# Altium PCB main_adapter_board_2016.PcbDoc
Units mm, origin at the board's own origin, x right, y up, seen from the top; angles counter-clockwise.
Board outline 100 x 40 mm, 2 copper layers (Top Layer, Bottom Layer), stack 1.571 mm thick; 76 components, 41 nets, 177 pads, 29 vias.
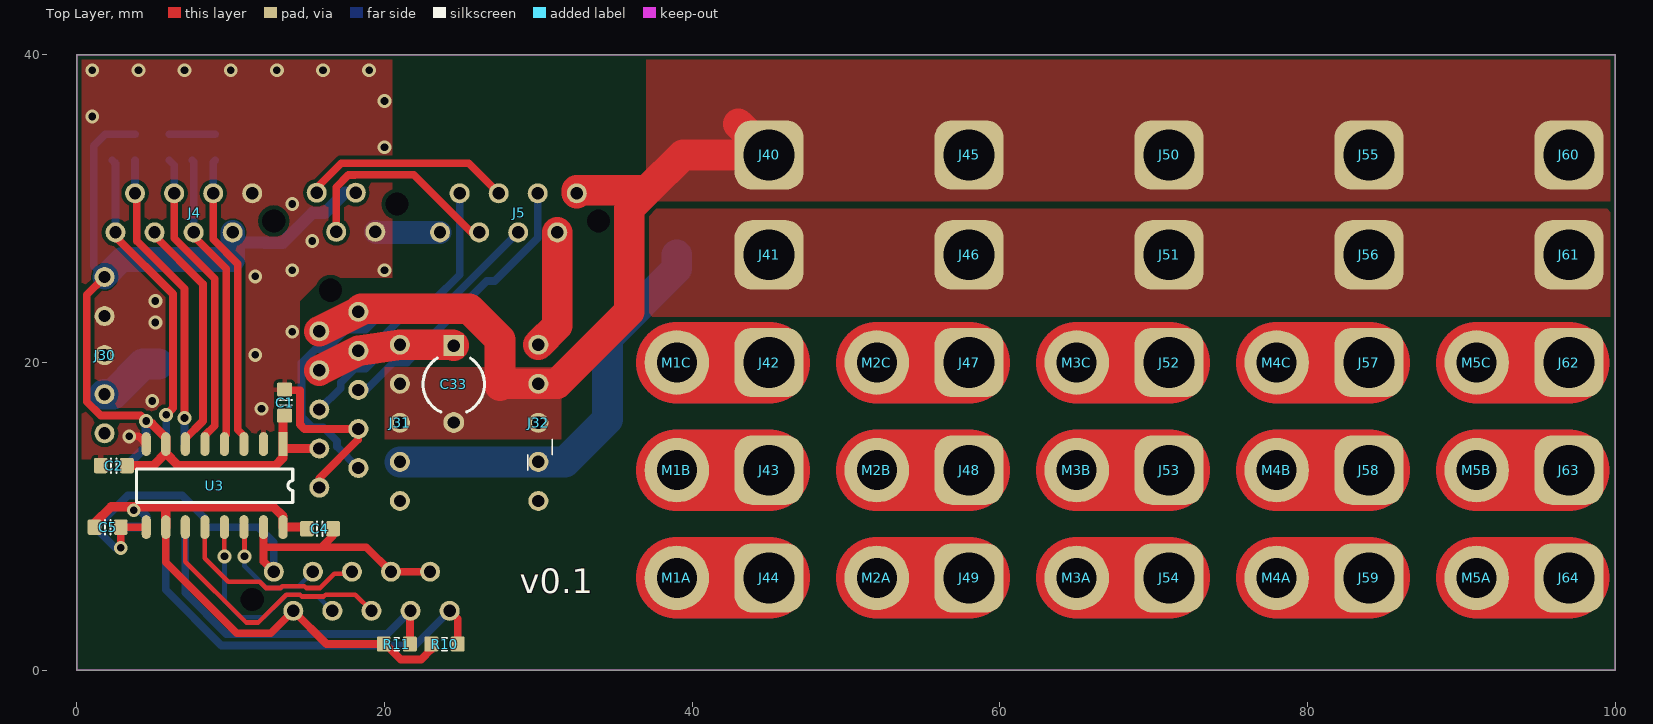
[diagram p0: Top Layer view]
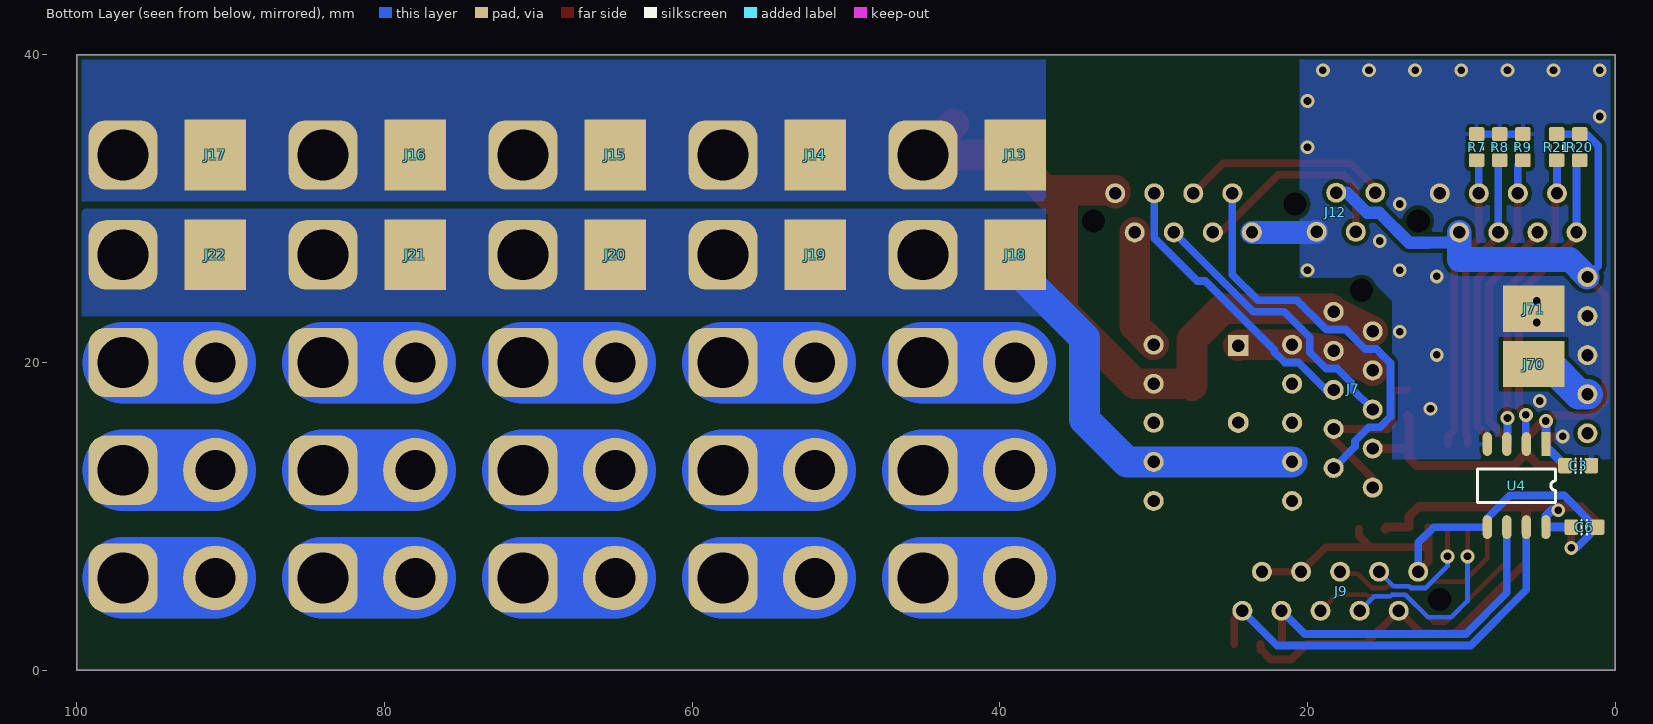
[diagram p1: Bottom Layer view, seen from below]
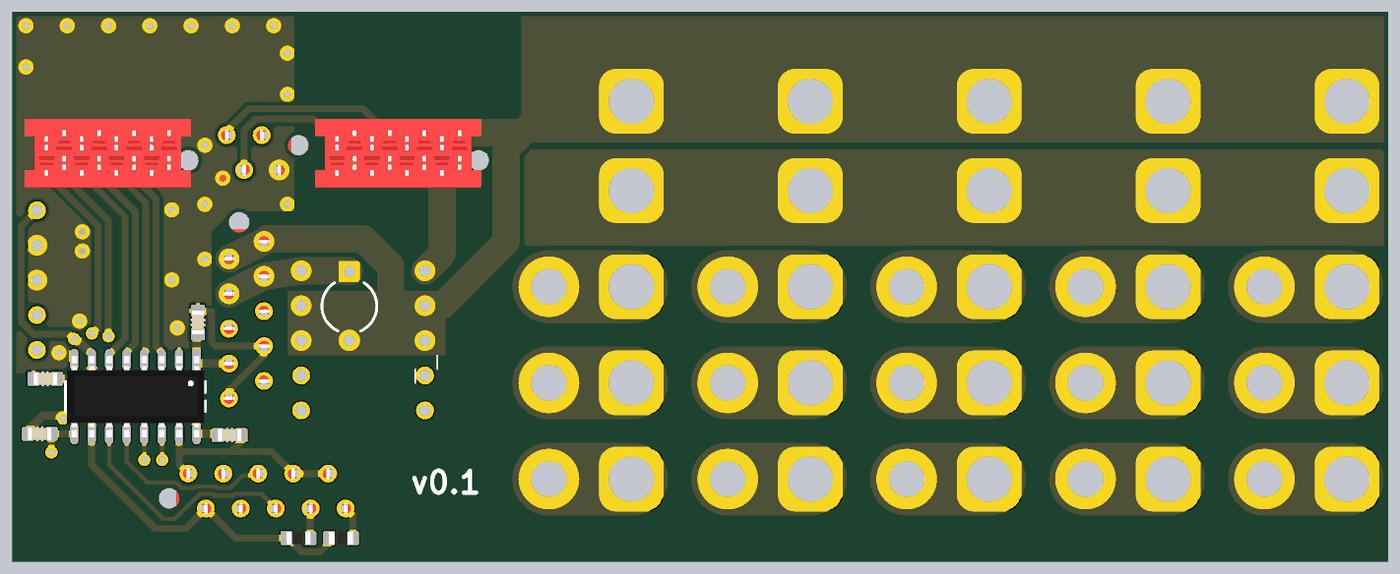
[diagram p2: 3D render of the assembled board from above, using the file's embedded part models]
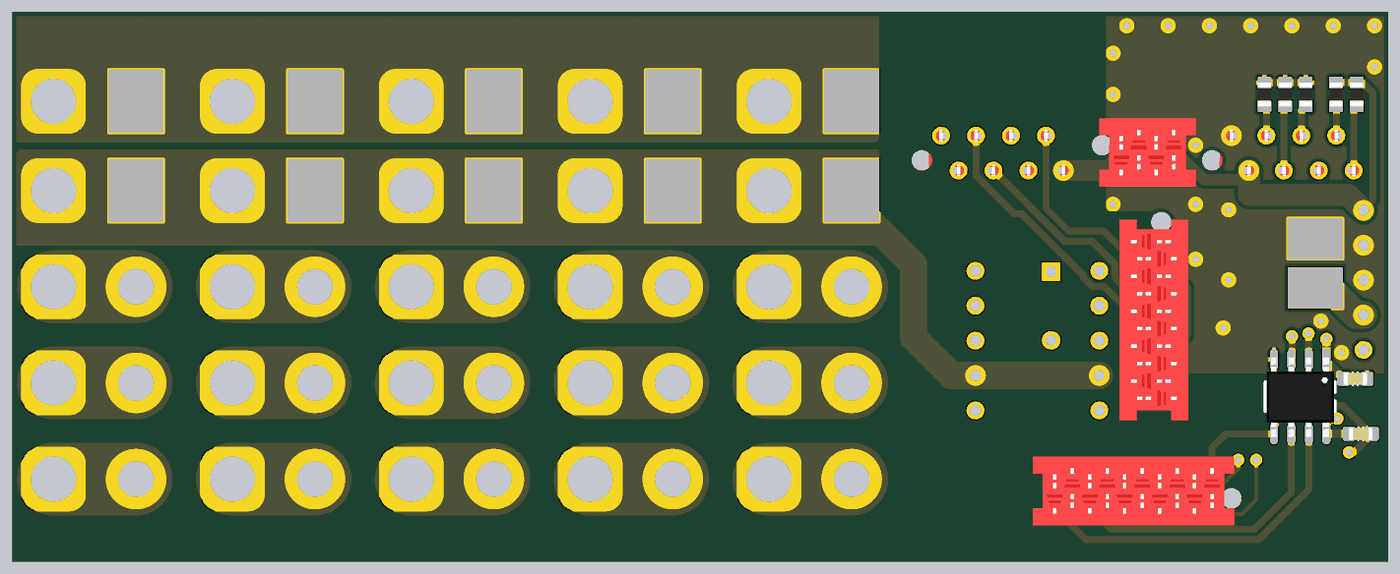
[diagram p3: 3D render of the assembled board from below, using the file's embedded part models]

## Layer stack, top to bottom
Top Solder: solder mask 0.0102, Solder Resist, Dk 3.5
Top Layer: signal copper 0.0356
Dielectric 1: dielectric 1.5, FR-4, Dk 4.8
Bottom Layer: signal copper 0.0356
Bottom Solder: solder mask 0.0102, Solder Resist, Dk 3.5

## Board outline
0,0 100,0 100,40 0,40

## Design rules (kind name [scope] priority, off if disabled: settings)
Clearance [All] p1: gap=0.254
ComponentClearance [All] p1: gap=0.1 collisioncheckmode=3 verticalgap=0.1 showdistances=FALSE
ComponentClearance ComponentClearanceIgnore [InComponent('C40')] p2: gap=0 collisioncheckmode=3 verticalgap=0 showdistances=FALSE
HoleSize [All] p1: absolutevalues=TRUE maxlimit=6 minlimit=0.3 maxpercent=80.000 minpercent=20.000
PolygonConnect PolygonConnectDirect [IsVia or InNet('16V') or InNet('PGND') or InComponent('J71') or InComponent('J30') or InComponent('J4') or InComponent('J12')] p1: connectstyle=Direct reliefconductorwidth=0.254 reliefentries=4 polygonreliefangle="90 Angle" airgapwidth=0.254
PolygonConnect [All] p2: connectstyle=Relief reliefconductorwidth=0.3 reliefentries=4 polygonreliefangle="90 Angle" airgapwidth=0.2
RoomDefinition main_adapter_board_2016 [InComponentClass('main_adapter_board_2016')] p1: confinementstyle=ConfineIn formatcopy=TRUE lockcomponents=FALSE outline 0,0 100,0 100,50 0,50
RoutingVias [All] p1: holewidth=0.7 width=0.4 viastyle="Through Hole" minholewidth=0.3 minwidth=0.6 maxholewidth=2 maxwidth=3
SolderMaskExpansion [All] p1: expansion=0.102
Width [All] p1: maxlimit=10 minlimit=0.2 preferedwidth=0.3 minimp=50.000000 maximp=50.000000 favimp=50.000000
28 further rules are at their usual default settings.

## Components (designator, comment, footprint, x,y, rotation, side; value= is the part's Value field where it differs from the comment)
C1 "100n" CAPC1608X90N 13.5,17.4 r90 top
C2 "100n" CAPC1608X90N 2.4,13.3 r0 top
C3 "100n" CAPC1608X90N 2.4,13.3 r0 bottom
C4 "100n" CAPC1608X90N 15.8,9.2 r180 top
C5 "100n" CAPC1608X90N 2,9.3 r0 top
C6 "100n" CAPC1608X90N 2,9.3 r180 bottom
C33 "470uF" CAPR5-4X5 24.5,18.6 r270 top
J4 "HEADER-8" MICRO-MATCH-8 11.4,31 r0 top
J5 "HEADER-8" MICRO-MATCH-8 32.5,31 r0 top
J7 "DRIBBLER" MICRO-MATCH-10 18.3,23.3 r90 bottom
J9 "COIL" MICRO-MATCH-10 12.8,6.4 r180 bottom
J12 "ERF" MICRO-MATCH-4 19.4,28.5 r0 bottom
J13 "GND_PAD" POWER-PAD 39,33.5 r180 bottom
J14 "GND_PAD" POWER-PAD 52,33.5 r180 bottom
J15 "GND_PAD" POWER-PAD 65,33.5 r180 bottom
J16 "GND_PAD" POWER-PAD 78,33.5 r180 bottom
J17 "GND_PAD" POWER-PAD 91,33.5 r180 bottom
J18 "16V_PAD" POWER-PAD 39,27 r180 bottom
J19 "16V_PAD" POWER-PAD 52,27 r180 bottom
J20 "16V_PAD" POWER-PAD 65,27 r180 bottom
J21 "16V_PAD" POWER-PAD 78,27 r180 bottom
J22 "16V_PAD" POWER-PAD 91,27 r180 bottom
J30 "D24V25F5" PIN-HEADER-5 1.8,15.4 r90 top
J31 "D24V25F7" PIN-HEADER-5 21,11 r90 top
J32 "D24V25F3" PIN-HEADER-5 30,11 r90 top
J40 "HEADER-1" 2MM-BULLET-PLUG-VIA#1 45,33.5 r0 top
J41 "HEADER-1" 2MM-BULLET-PLUG-VIA#1 45,27 r0 top
J42 "HEADER-1" 2MM-BULLET-PLUG-VIA#1 45,20 r0 top
J43 "HEADER-1" 2MM-BULLET-PLUG-VIA#1 45,13 r0 top
J44 "HEADER-1" 2MM-BULLET-PLUG-VIA#1 45,6 r0 top
J45 "HEADER-1" 2MM-BULLET-PLUG-VIA#2 61,33.5 r0 top
J46 "HEADER-1" 2MM-BULLET-PLUG-VIA#1 58,27 r0 top
J47 "HEADER-1" 2MM-BULLET-PLUG-VIA#1 58,20 r0 top
J48 "HEADER-1" 2MM-BULLET-PLUG-VIA#1 58,13 r0 top
J49 "HEADER-1" 2MM-BULLET-PLUG-VIA#1 58,6 r0 top
J50 "HEADER-1" 2MM-BULLET-PLUG-VIA#3 73,33.5 r0 top
J51 "HEADER-1" 2MM-BULLET-PLUG-VIA#1 71,27 r0 top
J52 "HEADER-1" 2MM-BULLET-PLUG-VIA#1 71,20 r0 top
J53 "HEADER-1" 2MM-BULLET-PLUG-VIA#1 71,13 r0 top
J54 "HEADER-1" 2MM-BULLET-PLUG-VIA#1 71,6 r0 top
J55 "HEADER-1" 2MM-BULLET-PLUG-VIA#4 85,33.5 r0 top
J56 "HEADER-1" 2MM-BULLET-PLUG-VIA#1 84,27 r0 top
J57 "HEADER-1" 2MM-BULLET-PLUG-VIA#1 84,20 r0 top
J58 "HEADER-1" 2MM-BULLET-PLUG-VIA#1 84,13 r0 top
J59 "HEADER-1" 2MM-BULLET-PLUG-VIA#1 84,6 r0 top
J60 "HEADER-1" 2MM-BULLET-PLUG-VIA#1 97,33.5 r0 top
J61 "HEADER-1" 2MM-BULLET-PLUG-VIA#1 97,27 r0 top
J62 "HEADER-1" 2MM-BULLET-PLUG-VIA#1 97,20 r0 top
J63 "HEADER-1" 2MM-BULLET-PLUG-VIA#1 97,13 r0 top
J64 "HEADER-1" 2MM-BULLET-PLUG-VIA#1 97,6 r0 top
J70 "16V_PAD" POWER-PAD-4x3 5.3,19.9 r180 bottom
J71 "GND_PAD" POWER-PAD-4x3 5.3,23.5 r180 bottom
M1A "HEADER-1" 2MM-BULLET-VIA 39,6 r0 top
M1B "HEADER-1" 2MM-BULLET-VIA 39,13 r0 top
M1C "HEADER-1" 2MM-BULLET-VIA 39,20 r0 top
M2A "HEADER-1" 2MM-BULLET-VIA 52,6 r0 top
M2B "HEADER-1" 2MM-BULLET-VIA 52,13 r0 top
M2C "HEADER-1" 2MM-BULLET-VIA 52,20 r0 top
M3A "HEADER-1" 2MM-BULLET-VIA 65,6 r0 top
M3B "HEADER-1" 2MM-BULLET-VIA 65,13 r0 top
M3C "HEADER-1" 2MM-BULLET-VIA 65,20 r0 top
M4A "HEADER-1" 2MM-BULLET-VIA 78,6 r0 top
M4B "HEADER-1" 2MM-BULLET-VIA 78,13 r0 top
M4C "HEADER-1" 2MM-BULLET-VIA 78,20 r0 top
M5A "HEADER-1" 2MM-BULLET-VIA 91,6 r0 top
M5B "HEADER-1" 2MM-BULLET-VIA 91,13 r0 top
M5C "HEADER-1" 2MM-BULLET-VIA 91,20 r0 top
R7 "10k" RESC1608X55N 9,34 r270 bottom
R8 "10k" RESC1608X55N 7.5,34 r270 bottom
R9 "10k" RESC1608X55N 6,34 r270 bottom
R10 "2.2k" RESC1608X55N 23.9,1.7 r180 top
R11 "2.2k" RESC1608X55N 20.8,1.7 r180 top
R20 "2.2k" RESC1608X55N 2.3,34 r270 bottom
R21 "2.2k" RESC1608X55N 3.8,34 r270 bottom
U3 "SI8641" SOIC16 13.4,14.7 r270 top
U4 "SI8602" SOIC8 4.5,14.7 r270 bottom

## Footprints (in the part's own frame and the unit in brackets; to place one, negate y for a bottom-side part, rotate by r counter-clockwise, add the part's x,y. Pads: shape width x height; smd on the part's side, far side on the other; paste and mask are expansions set on the pad)
2MM-BULLET-PLUG-VIA#1 [mm]
  rrect50% 4.5x4.5 hole 3.3: 1(0,0)
2MM-BULLET-PLUG-VIA#2 [mm]
  rrect50% 4.5x4.5 hole 3.3: 1(-3,0)
2MM-BULLET-PLUG-VIA#3 [mm]
  rrect50% 4.5x4.5 hole 3.3: 1(-2,0)
2MM-BULLET-PLUG-VIA#4 [mm]
  rrect50% 4.5x4.5 hole 3.3: 1(-1,0)
2MM-BULLET-VIA [mm]
  round 4.2 hole 2.6: 1(0,0)
CAPC1608X90N [mm] "Chip Capacitor, Body 1.6x0.8mm, EIA 0603, IPC Medium Density"
  round 0.254 on Mech15: 0(0,0)
  rrect25% 0.9x1 smd: 1(-0.85,0) 2(0.85,0)
  Top Layer pour cut-out: -0.6,0.5 -0.4,0.7 0.4,0.7 0.6,0.5 0.6,-0.5 0.4,-0.7 -0.4,-0.7 -0.6,-0.5
  silkscreen extent -0.18,-0.48 0.18,0.48, body extent -0.85,-0.45 0.85,0.45, height 0.89
CAPR5-4X5 [mm] "Capacitor; 2 Leads"
  rect 1.35x1.35 hole 0.8: 1(-2.5,0)
  round 1.35 hole 0.8: 2(2.5,0)
  silkscreen extent -1.69,-2 1.82,2
MICRO-MATCH-4 [mm]
  round 1.3 hole 0.8: 1(0,0) 2(-1.27,-2.54) 3(-2.54,0) 4(-3.81,-2.54)
  round 0 hole 1.5 unplated: drill(1.4,-1.8)
  body extent -5.41,-3.77 1.6,1.23, height 4
MICRO-MATCH-8 [mm]
  round 1.3 hole 0.8: 1(0,0) 2(-1.27,-2.54) 3(-2.54,0) 4(-3.81,-2.54) 5(-5.08,0) 6(-6.35,-2.54) 7(-7.62,0) 8(-8.89,-2.54)
  round 0 hole 1.5 unplated: drill(1.4,-1.8)
  body extent -10.49,-3.77 1.6,1.23, height 4
MICRO-MATCH-10 [mm]
  round 1.3 hole 0.8: 1(0,0) 2(-1.27,-2.54) 3(-2.54,0) 4(-3.81,-2.54) 5(-5.08,0) 6(-6.35,-2.54) 7(-7.62,0) 8(-8.89,-2.54) 9(-10.16,0) 10(-11.43,-2.54)
  round 0 hole 1.5 unplated: drill(1.4,-1.8)
  body extent -13.03,-3.77 1.6,1.23, height 4
PIN-HEADER-5 [mm]
  round 1.3 hole 0.8: 1(0,0) 2(2.54,0) 3(5.08,0) 4(7.62,0) 5(10.16,0)
POWER-PAD [mm]
  rect 4x4.6 smd: 1(0,0)
POWER-PAD-4x3 [mm]
  rect 4x3 smd: 1(0,0)
RESC1608X55N [mm] "Chip Resistor, Body 1.6x0.8mm, EIA 0603, IPC Medium Density"
  round 0.254 on Mech15: 0(0,0)
  rrect25% 0.9x1 smd: 1(-0.85,0) 2(0.85,0)
  Top Layer pour cut-out: -0.6,0.5 -0.4,0.7 0.4,0.7 0.6,0.5 0.6,-0.5 0.4,-0.7 -0.4,-0.7 -0.6,-0.5
  silkscreen extent -0.15,-0.41 0.15,0.41, body extent -0.87,-0.47 0.88,0.48, height 0.54
SOIC8 [mm]
  rect 1.55x0.6 smd: 1(0,0)
  oval 1.55x0.6 smd: 2(0,-1.27) 3(0,-2.54) 4(0,-3.81) 5(5.4,-3.81) 6(5.4,-2.54) 7(5.4,-1.27) 8(5.4,0)
  silkscreen extent 1.61,-4.45 3.79,0.63, body extent -0.16,-4.35 5.61,0.55, height 1.46
SOIC16 [mm]
  rect 1.55x0.6 smd: 1(0,0)
  oval 1.55x0.6 smd: 2(0,-1.27) 3(0,-2.54) 4(0,-3.81) 5(0,-5.08) 6(0,-6.35) 7(0,-7.62) 8(0,-8.89) 9(5.4,-8.89) 10(5.4,-7.62) 11(5.4,-6.35) 12(5.4,-5.08) 13(5.4,-3.81) 14(5.4,-2.54) 15(5.4,-1.27) 16(5.4,0)
  silkscreen extent 1.61,-9.53 3.79,0.64, body extent -0.25,-9.42 5.66,0.57, height 1.46

## Part data
C1 C2 C3 C4 C5 C6: library part CAPC_100n_0603_X7R_50V_10%, "Capacitor SMD Cer 100nF 10% 50V X7R 0603"
C33: library part Cap2, "Capacitor"
J7 J9: library part HEADER-10
J12: library part HEADER-4
J13 J14 J15 J16 J17 J18 J19 J20 J21 J22 J70 J71: library part HEADER-1
J30 J31 J32: library part HEADER-5
R7 R8 R9 R10 R11 R20 R21: library part RES_120R_0603_5%, "Resistor SMD chip 120 Ohm 0.1W 5% 0603"

## Via types
v1: diameter 0.9, hole 0.5, Top Layer to Bottom Layer, 29 vias

## Nets (pads, with @x,y where several pads share a name; then routed paths per layer and width w, separated by ;. In a path a pad name is that pad's centre, name@x,y a point inside that pad or via, vN(x,y) a via of type N, cw(c..) or ccw(c..) an arc to the next point about the centre after c; other vN are vias at no path point)
3.3V: J5.2 J32.5 | length 7.8
  Top Layer w2: J32.5 31.23,22.39 J5.2
5V: C1.1 C2.2 C3.2 J4.2 J7.8 J12.2 J30.5 R20.1 R21.1 U3.1 U3.7 U4.1 | length 67.4
  Top Layer w0.5: J30.5 0.646,24.406 0.646,17.454 1.546,16.554 4.146,16.554 v1(4.5,16.2) v1@4.535,16.165
  Top Layer w0.6: C2.2 4.96,13.3 U3.7@5.78,14.12 ; v1@4.535,16.165 4.671,16.029 4.864,16.029 5.78,15.113 U3.7 U3.7@5.78,14.12 ; C1.1 13.4,16.45 U3.1 U3.1@13.4,14.3 ; J7.8 13.51,14.41 U3.1@13.4,14.3 ; U3.7@5.78,14.12 6.6,13.3 12.9,13.3 13.4,13.8 U3.1@13.4,14.3
  Bottom Layer w0.5: J30.5 1.1,26.26 1.1,34.1 1.85,34.85 R20.1 R21.1
  Bottom Layer w0.6: C3.2 4.5,14.55 v1(4.5,16.2)
  Bottom Layer w0.8: J4.2 10.79,27.8 12.214,27.8 12.218,27.796 13.396,27.796 15.336,29.736 16.13,29.736 17.434,31.04 J12.2
  Bottom Layer w1.6: J30.5 2.94,26.7 10.13,26.7 J4.2
5V_COIL: C4.2 C5.1 C6.1 J9.2 R10.2 R11.2 U3.10 U3.16 U4.8 | length 44.2
  Top Layer w0.5: U3.10 5.78,7.02 10.4,2.4 12.61,2.4 J9.2 16.23,1.7 R11.2 20.053,1.7 21.057,0.696 22.396,0.696 23.05,1.35 R10.2
  Top Layer w0.6: C5.1 1.15,9.55 2.229,10.629 5.8,10.629 ; U3.10 5.78,10.609 5.8,10.629 ; C4.2 14.85,9.3 U3.16 13.4,10 12.771,10.629 5.8,10.629
  Bottom Layer w0.6: C6.1 U4.8 4.5,10 4.1,10.4 v1(3.7,10.4)
7.5V: C33.1 J7.3 J7.4 J31.5 | length 9.1
  Top Layer w2: J7.4 J7.3 J31.5 24.44,21.16 C33.1
16V: J18.1 J19.1 J20.1 J21.1 J22.1 J31.2 J32.2 J41.1 J46.1 J51.1 J56.1 J61.1 | length 27.2
  Bottom Layer w2: J31.2 J32.2 31.74,13.54 34.5,16.3 34.5,21.6 39,26.1 J18.1
16V_PC: J30.2 J70.1 | length 4.3
  Bottom Layer w2: J30.2 2.34,17.94 4.3,19.9 J70.1
BALL_SENS: J5.7 J7.9 | length 26.7
  Bottom Layer w0.5: J7.9 16.914,14.526 16.914,14.888 16.006,15.796 15.282,15.796 14.606,16.472 14.606,19.968 15.514,20.876 16.238,20.876 17.508,22.146 18.778,22.146 20.686,24.054 23.218,24.054 24.88,25.716 J5.7
CHARGE: J4.5 R9.2 U3.5 | length 19.9
  Top Layer w0.5: J4.5 6.32,28.08 8.954,25.446 8.954,15.888 8.32,15.254 U3.5
  Bottom Layer w0.5: R9.2 6.32,32.83 J4.5
CHARGE_COIL: J9.5 U3.12 | length 12.9
  Top Layer w0.3: U3.12 8.32,7.28 9.846,5.754 11.878,5.754 12.286,5.346 13.237,5.346 13.359,5.468 14.781,5.468 14.903,5.346 15.822,5.346 16.738,6.262 17.742,6.262 J9.5
DONE: J4.6 U3.6 | length 15.5
  Top Layer w0.5: J4.6 5.05,28.25 8.2,25.1 8.2,16.2 7.05,15.05 U3.6
DONE_COIL: J9.6 U3.11 | length 17.3
  Top Layer w0.3: U3.11 7.05,7.05 11,3.1 11.8,3.1 13.614,4.914 14.507,4.914 14.629,4.792 16.051,4.792 16.173,4.914 18.096,4.914 J9.6
GND: C1.2 C2.1 C3.1 J4.1 J5.8 J7.7 J7.10 J12.1 J30.3 J30.4 J71.1 R7.1 R8.1 R9.1 U3.2 U3.8 U4.4 | length 20.6
  Top Layer w0.5: v1(3.4,15.2) 4.01,15.2 U3.8 ; C1.2 13.554,18.196 14.504,18.196 14.504,15.97 14.794,15.68 J7.7 18.3,15 15.76,12.46 J7.10
  Bottom Layer w0.5: R9.1 R8.1 R7.1
  Bottom Layer w1.5: J12.1 19.44,28.46 J5.8
  other v1: 12,17 4.9,17.5 11.6,20.5 14,22 5.1,22.6 5.1,24 11.6,25.6 14,26 20,26 15.3,27.9 14,30.3 20,34 1,36 20,37 1,39 4,39 7,39 10,39 13,39 16,39 19,39
GND_COIL: C4.1 C5.2 C6.2 J9.1 J9.7 J9.9 U3.9 U3.15 U4.5 | length 37.5
  Top Layer w0.5: v1(2.85,7.95) C5.2 U3.9 ; U3.15 12.13,8 ; J9.1 12.13,7.07 12.13,8 ; C4.1 16.65,8.75 15.9,8 ; J9.9 J9.7 18.82,8 15.9,8 ; 12.13,8 15.9,8
  Bottom Layer w0.5: v1(2.85,7.95) 2.5,7.95 C6.2 1.251,9.3 3.305,11.354 6.846,11.354 8.31,9.89 U4.5 11.8,9.3 12.8,8.3 J9.1
KICK1: J4.3 R7.2 U3.3 | length 19.3
  Top Layer w0.5: J4.3 8.86,28.006 10.462,26.404 10.462,15.638 10.86,15.24 U3.3
  Bottom Layer w0.5: J4.3 8.86,33.01 R7.2
KICK1_COIL: J9.3 U3.14 | length 8
  Top Layer w0.3: U3.14 10.9,9.26 v1(10.9,7.4)
  Bottom Layer w0.3: v1(10.9,7.4) 10.9,6.748 12.302,5.346 13.282,5.346 13.404,5.468 14.408,5.468 J9.3
KICK2: J4.4 R8.2 U3.4 | length 19.4
  Top Layer w0.5: J4.4 7.59,28.21 9.708,26.092 9.708,15.308 9.59,15.19 U3.4
  Bottom Layer w0.5: R8.2 7.59,33.06 J4.4
KICK2_COIL: J9.4 U3.13 | length 13.3
  Top Layer w0.3: U3.13 9.59,7.41 v1(9.6,7.4)
  Bottom Layer w0.3: v1(9.6,7.4) 9.6,4.5 10.654,3.446 12.165,3.446 13.633,4.914 14.507,4.914 14.621,4.8 15.67,4.8 J9.4
NetJ42_1: J42.1 M1C.1 | length 12
  Top Layer w5.3: M1C.1 J42.1
  Bottom Layer w5.3: M1C.1 J42.1
NetJ43_1: J43.1 M1B.1 | length 12
  Top Layer w5.3: M1B.1 J43.1
  Bottom Layer w5.3: M1B.1 J43.1
NetJ44_1: J44.1 M1A.1 | length 12
  Top Layer w5.3: M1A.1 J44.1
  Bottom Layer w5.3: M1A.1 J44.1
NetJ47_1: J47.1 M2C.1 | length 12
  Top Layer w5.3: M2C.1 J47.1
  Bottom Layer w5.3: M2C.1 J47.1
NetJ48_1: J48.1 M2B.1 | length 12
  Top Layer w5.3: M2B.1 J48.1
  Bottom Layer w5.3: M2B.1 J48.1
NetJ49_1: J49.1 M2A.1 | length 12
  Top Layer w5.3: M2A.1 J49.1
  Bottom Layer w5.3: M2A.1 J49.1
NetJ52_1: J52.1 M3C.1 | length 12
  Top Layer w5.3: M3C.1 J52.1
  Bottom Layer w5.3: M3C.1 J52.1
NetJ53_1: J53.1 M3B.1 | length 12
  Top Layer w5.3: M3B.1 J53.1
  Bottom Layer w5.3: M3B.1 J53.1
NetJ54_1: J54.1 M3A.1 | length 12
  Top Layer w5.3: M3A.1 J54.1
  Bottom Layer w5.3: M3A.1 J54.1
NetJ57_1: J57.1 M4C.1 | length 12
  Top Layer w5.3: M4C.1 J57.1
  Bottom Layer w5.3: M4C.1 J57.1
NetJ58_1: J58.1 M4B.1 | length 12
  Top Layer w5.3: M4B.1 J58.1
  Bottom Layer w5.3: M4B.1 J58.1
NetJ59_1: J59.1 M4A.1 | length 12
  Top Layer w5.3: M4A.1 J59.1
  Bottom Layer w5.3: M4A.1 J59.1
NetJ62_1: J62.1 M5C.1 | length 12
  Top Layer w5.3: M5C.1 J62.1
  Bottom Layer w5.3: M5C.1 J62.1
NetJ63_1: J63.1 M5B.1 | length 12
  Top Layer w5.3: M5B.1 J63.1
  Bottom Layer w5.3: M5B.1 J63.1
NetJ64_1: J64.1 M5A.1 | length 12
  Top Layer w5.3: M5A.1 J64.1
  Bottom Layer w5.3: M5A.1 J64.1
PGND: C33.2 J5.1 J7.1 J7.2 J13.1 J14.1 J15.1 J16.1 J17.1 J31.3 J31.4 J32.3 J32.4 J40.1 J45.1 J50.1 J55.1 J60.1 | length 51.2
  Top Layer w2: J7.2 J7.1 18.5,23.5 25.5,23.5 27.5,21.5 27.5,18.5 27.62,18.62 J32.4 31.22,18.62 35.904,23.304 35.904,30.004 37.104,31.204 ; J5.1 32.5,31.204 37.104,31.204 ; 43,35.5 J40.1 39.4,33.5 37.104,31.204
RX_ERF: J5.5 J12.4 | length 13.6
  Top Layer w0.5: J12.4 15.59,31.362 17.182,32.954 25.466,32.954 J5.5
SCL: J4.7 R21.2 U4.3 | length 19.8
  Top Layer w0.5: J4.7 3.896,30.884 3.896,27.904 7,24.8 v1(7,16.4)
  Bottom Layer w0.5: J4.7 3.78,33.13 R21.2 ; v1(7,16.4) 7,14.74 U4.3
SCL_COIL: J9.8 R11.1 U4.6 | length 22.8
  Top Layer w0.5: R11.1 21.65,3.82 J9.8
  Bottom Layer w0.5: U4.6 7.04,5.026 9.712,2.354 20.184,2.354 J9.8
SDA: J4.8 R20.2 U4.2 | length 20.3
  Top Layer w0.5: J4.8 2.51,28.19 6.246,24.454 6.246,17.046 v1(5.8,16.6)
  Bottom Layer w0.5: R20.2 2.51,32.94 J4.8 ; U4.2 5.8,14.73 v1(5.8,16.6)
SDA_COIL: J9.10 R10.1 U4.7 | length 27.3
  Top Layer w0.5: J9.10 24.75,3.34 R10.1
  Bottom Layer w0.5: U4.7 5.77,5.23 9.4,1.6 21.97,1.6 J9.10
SERVO1: J5.3 J7.5 | length 18.7
  Bottom Layer w0.5: J7.5 18.82,18.22 20.606,20.006 21.478,20.006 22.154,20.682 22.154,20.817 26.637,25.3 27.162,25.3 29.96,28.098 J5.3
SERVO2: J5.4 J7.6 | length 18.5
  Bottom Layer w0.5: J7.6 17.146,18.336 17.146,18.698 18.054,19.606 18.778,19.606 19.846,20.674 19.846,21.638 21.508,23.3 23.53,23.3 J5.4
TX_ERF: J5.6 J12.3 | length 14.1
  Top Layer w0.5: J12.3 16.86,31.402 17.652,32.194 18.054,32.194 18.06,32.2 21.9,32.2 25.64,28.46 J5.6
pads on no net: C1.0 C2.0 C3.0 C4.0 C5.0 C6.0 J4.drill J5.drill J7.drill J9.drill J12.drill J30.1 J31.1 J32.1 R7.0 R8.0 R9.0 R10.0 R11.0 R20.0 R21.0

## Polygon pours and split planes (outlines as drawn)
PGND on Top Layer "Top Layer-No Net 1" (solid, remove dead copper, pour order 12): 37,30.5 37,40 100,40 100,30.5
16V on Top Layer "Top Layer-No Net 1" (solid, remove dead copper, pour order 9): 100.2,22.988 37.2,22.988 37.2,29.988 100.2,29.988
PGND on Top Layer "Top Layer-No Net 1" (solid, remove dead copper, pour order 13): 20,19.7 20,15 31.5,15 31.5,19.7
GND on Top Layer "Top Layer-No Net 1" (solid, remove dead copper, pour order 15): 0,40 20.5,40 20.5,25.5 16,25.5 14.5,24 14.5,13.7 0,13.7
GND on Bottom Layer "Top Layer-No Net 1" (solid, remove dead copper, pour order 14): 0,40 0,13.7 14.5,13.7 14.5,24 16,25.5 20.5,25.5 20.5,40
PGND on Bottom Layer "Top Layer-No Net 1" (solid, remove dead copper, pour order 11): 37,30.5 100,30.5 100,40 37,40
16V on Bottom Layer "Top Layer-No Net 1" (solid, remove dead copper, pour order 10): 37,30 37,23 100,23 100,30

## Keep-outs
Keep-Out Layer:
  the board outline again, w0.1

## Silkscreen, mask and mechanical layers (free items; w line width, h text height)
Top Overlay:
  lines w0.1: 29.3,13 29.3,14 ; 30.9,14 30.9,15
  text "v0.1" at 28.8,5 h1.6